# EAGLE board 5vac-dc reg (EAGLE 9.6.2)
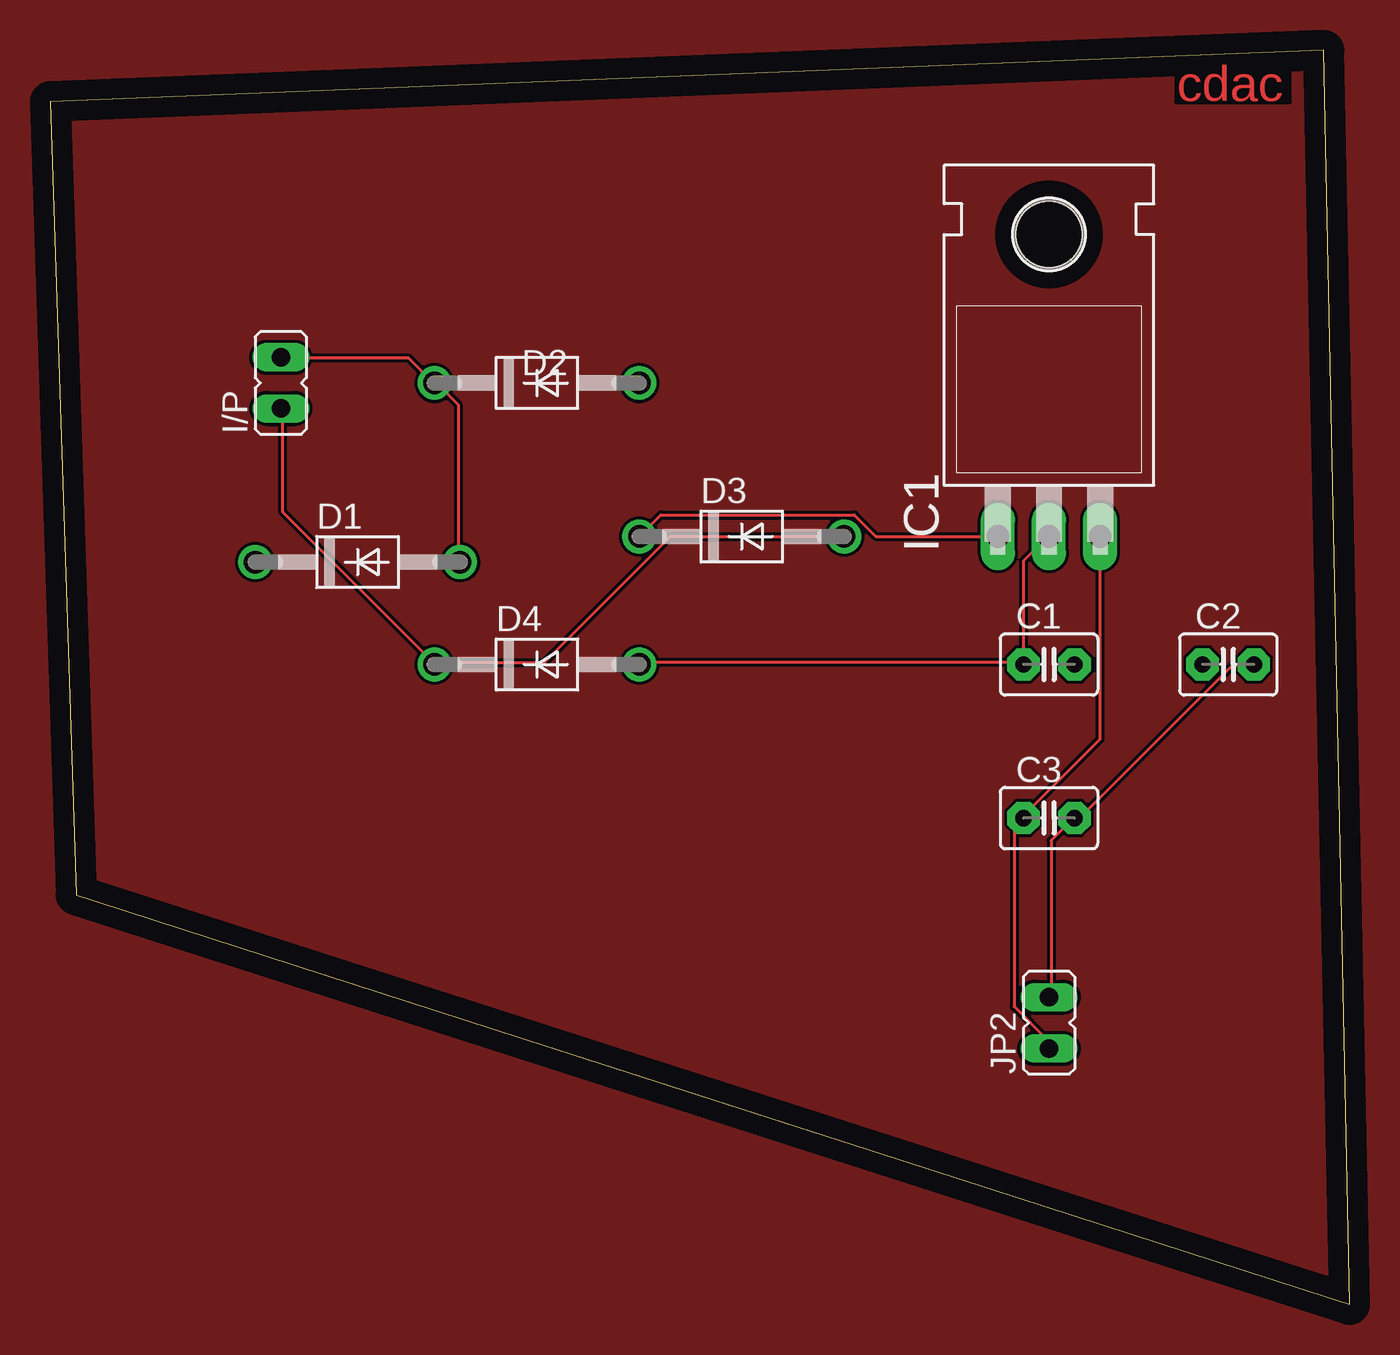
[diagram p0: board, top side]
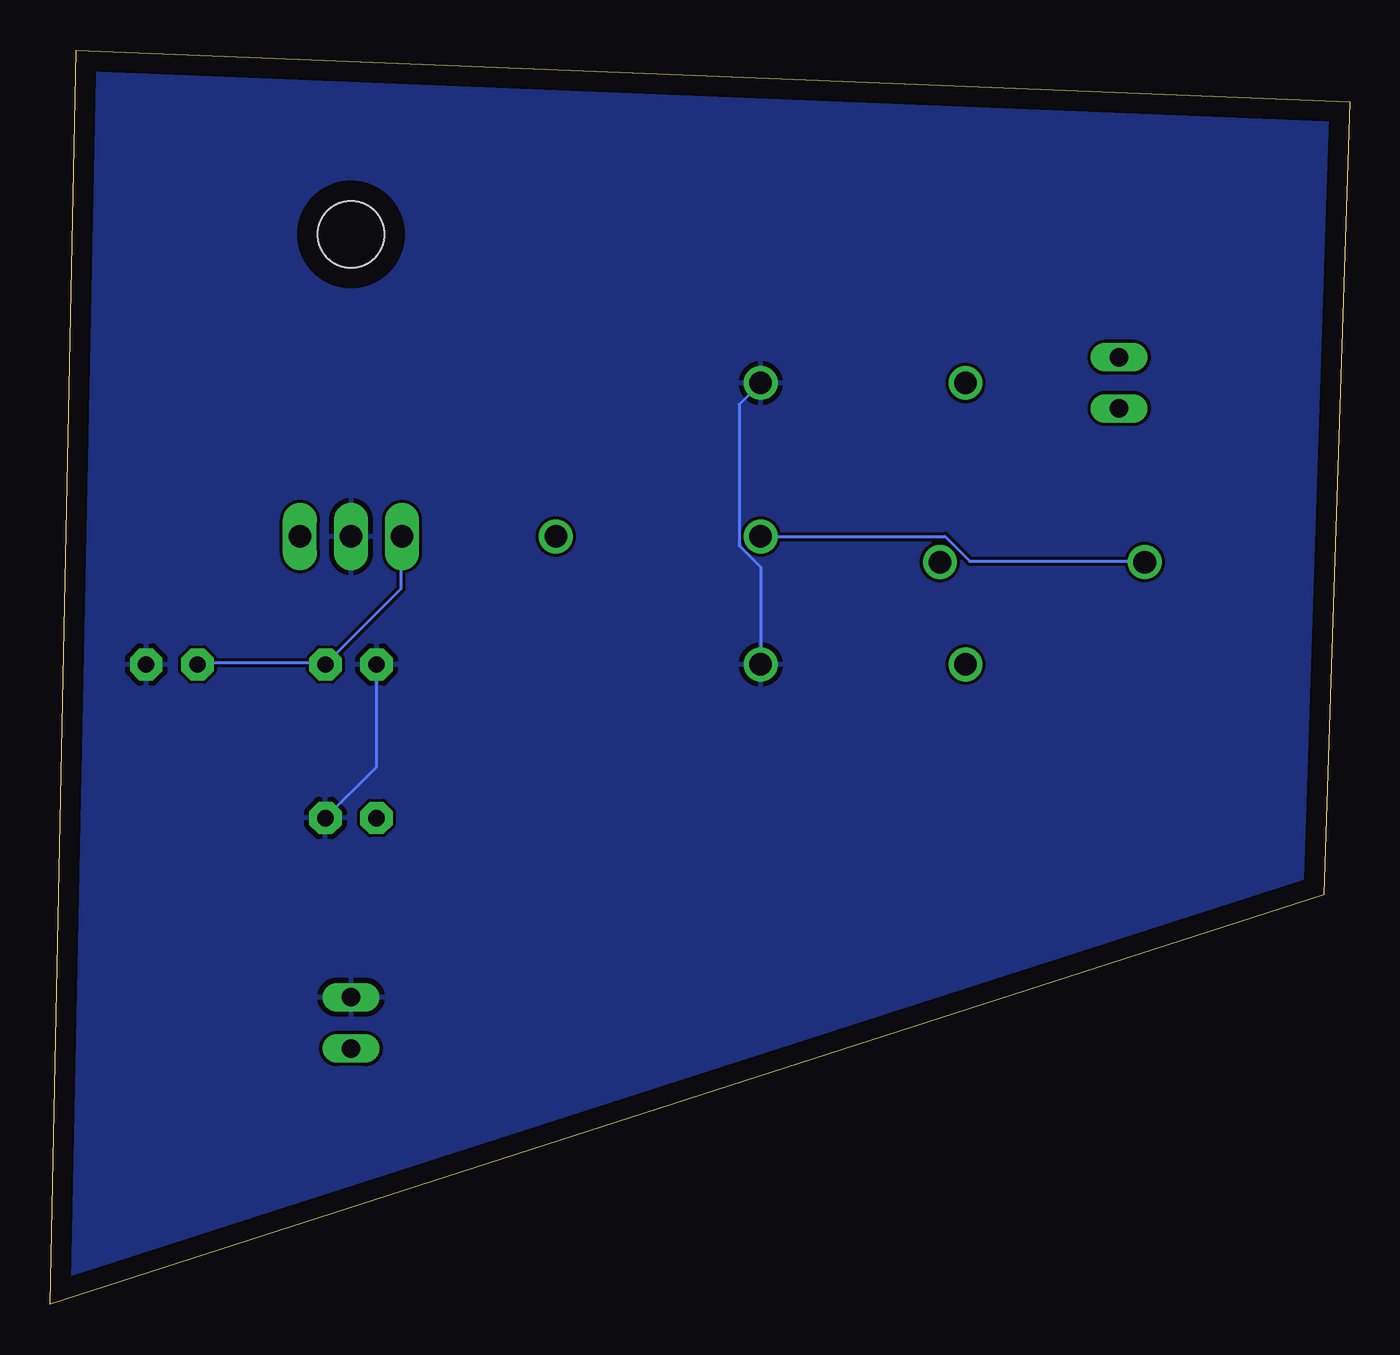
[diagram p1: board, bottom side, seen from below]

Size 64.44 x 62.22 mm. Coordinates in mm from the lower left corner, seen from the top.
Outline: 1.27,20.32 64.44,0 63.17,62.22 0,59.68 1.27,20.32
Copper layers (1*16): Top 0.035mm / dielectric 1.5mm / Bottom 0.035mm
Design rules "default": minimum track width 6mil, minimum drill 0.35mm, track to track 6mil, track to pad 6mil, pad to pad 6mil, via to via 6mil, smd to smd 6mil, copper to edge 40mil, drill to drill 6mil, minimum pad ring 10mil, minimum via ring 8mil, stop-mask expansion 4mil, vias tented up to drill 0mil, thermal gap 10mil

## Footprints (pad centres in the part's own frame; a part is rotated, then mirrored left to right if it is on the bottom)
C2.5-3 = drill 0.813 pad 1.6 octagon: 1 -1.27,0; 2 1.27,0
DO41-10 = drill 1.118: A 5.08,0; C -5.08,0
JP1 = drill 0.914 long: 1 0,-1.27; 2 0,1.27
TO220H = drill 1.118 long: 1 -2.54,-10.16; 2 0,-10.16; 3 2.54,-10.16 | hole 3.302: 0,4.826

## Placement (x,y rotation side)
C1  1000uf  [C2.5-3]  49.53,31.75 0 top
C2  0.33uf  [C2.5-3]  58.42,31.75 0 top
C3  0.1uf  [C2.5-3]  49.53,24.13 0 top
D1  1N4004  [DO41-10]  15.24,36.83 0 top
D2  1N4004  [DO41-10]  24.13,45.72 0 top
D3  1N4004  [DO41-10]  34.29,38.1 0 top
D4  1N4004  [DO41-10]  24.13,31.75 0 top
I/P  12vac  [JP1]  11.43,45.72 0 top
IC1  7805T  [TO220H]  49.53,48.26 0 top
JP2  5v dc  [JP1]  49.53,13.97 0 top

## Library data of the parts
C1-C3 = capacitor-wima
D1-D4 = diode
I/P JP2 = jumper
IC1 = linear

## Nets
GND: C1.1 C2.2 C3.2 D2.A D4.A IC1.2 JP2.2
N$1: D1.A D2.C I/P.2
N$2: C3.1 IC1.3 JP2.1
N$5: D3.A D4.C I/P.1
N$7: C1.2 C2.1 D1.C D3.C IC1.1

## Tracks (layer width: path | path; a pad name or v marks a point on that pad's centre or on a via)
A
  pour Top: -12.7,68.58 74.93,68.58 76.2,69.85 76.2,-3.81 -7.62,-3.81 -10.16,-6.35 -10.16,66.04
GND
  Top 0.152: 48.26,31.85 48.26,36.88 49.48,38.1 IC1.2 | JP2.2 49.63,15.24 49.63,23.01 50.7,24.08 C3.2 50.85,24.23 51.16,24.23 58.62,31.7 59.69,31.7 C2.2 | 48.26,31.85 29.21,31.85 D4.A | 48.26,31.85 C1.1
  Bottom 0.152: D4.A 29.21,36.58 30.28,37.64 30.28,44.65 D2.A | C1.1 48.26,26.67 C3.2
  pour Bottom: -16.51,72.39 82.55,72.39 87.63,77.47 87.63,-7.62 88.9,-8.89 -12.7,-8.89 -24.13,-20.32 -24.13,63.5
N$1
  Top 0.152: I/P.2 11.53,46.94 17.78,46.94 19,45.72 D2.C 19.15,45.72 20.22,44.65 20.22,36.88 D1.A
N$2
  Top 0.152: JP2.1 49.48,12.8 49.48,13.11 47.8,14.78 47.8,23.62 48.26,24.08 C3.1 48.26,24.23 52.07,28.04 IC1.3
N$5
  Top 0.152: I/P.1 11.53,44.35 11.53,39.32 19,31.85 D4.C 19.15,31.85 24.49,31.85 30.73,38.1 D3.A
N$7
  Top 0.152: IC1.1 40.95,38.1 39.88,39.17 30.28,39.17 D3.C
  Bottom 0.152: C2.1 57.1,31.85 50.85,31.85 C1.2 47.04,35.51 47.04,38.1 IC1.1 | D3.C 20.07,38.1 18.85,36.88 10.16,36.88 D1.C

## Text on the board
Top: cdac